# Altium PCB USBAERmini2PCB.PCBDOC (part 1 of 2)
Units mm, origin at the board's own origin, x right, y up, seen from the top; angles counter-clockwise.
Board outline 159.12 x 127.1 mm, 2 copper layers (Top Layer, Bottom Layer); 87 components, 131 nets, 595 pads, 148 vias.
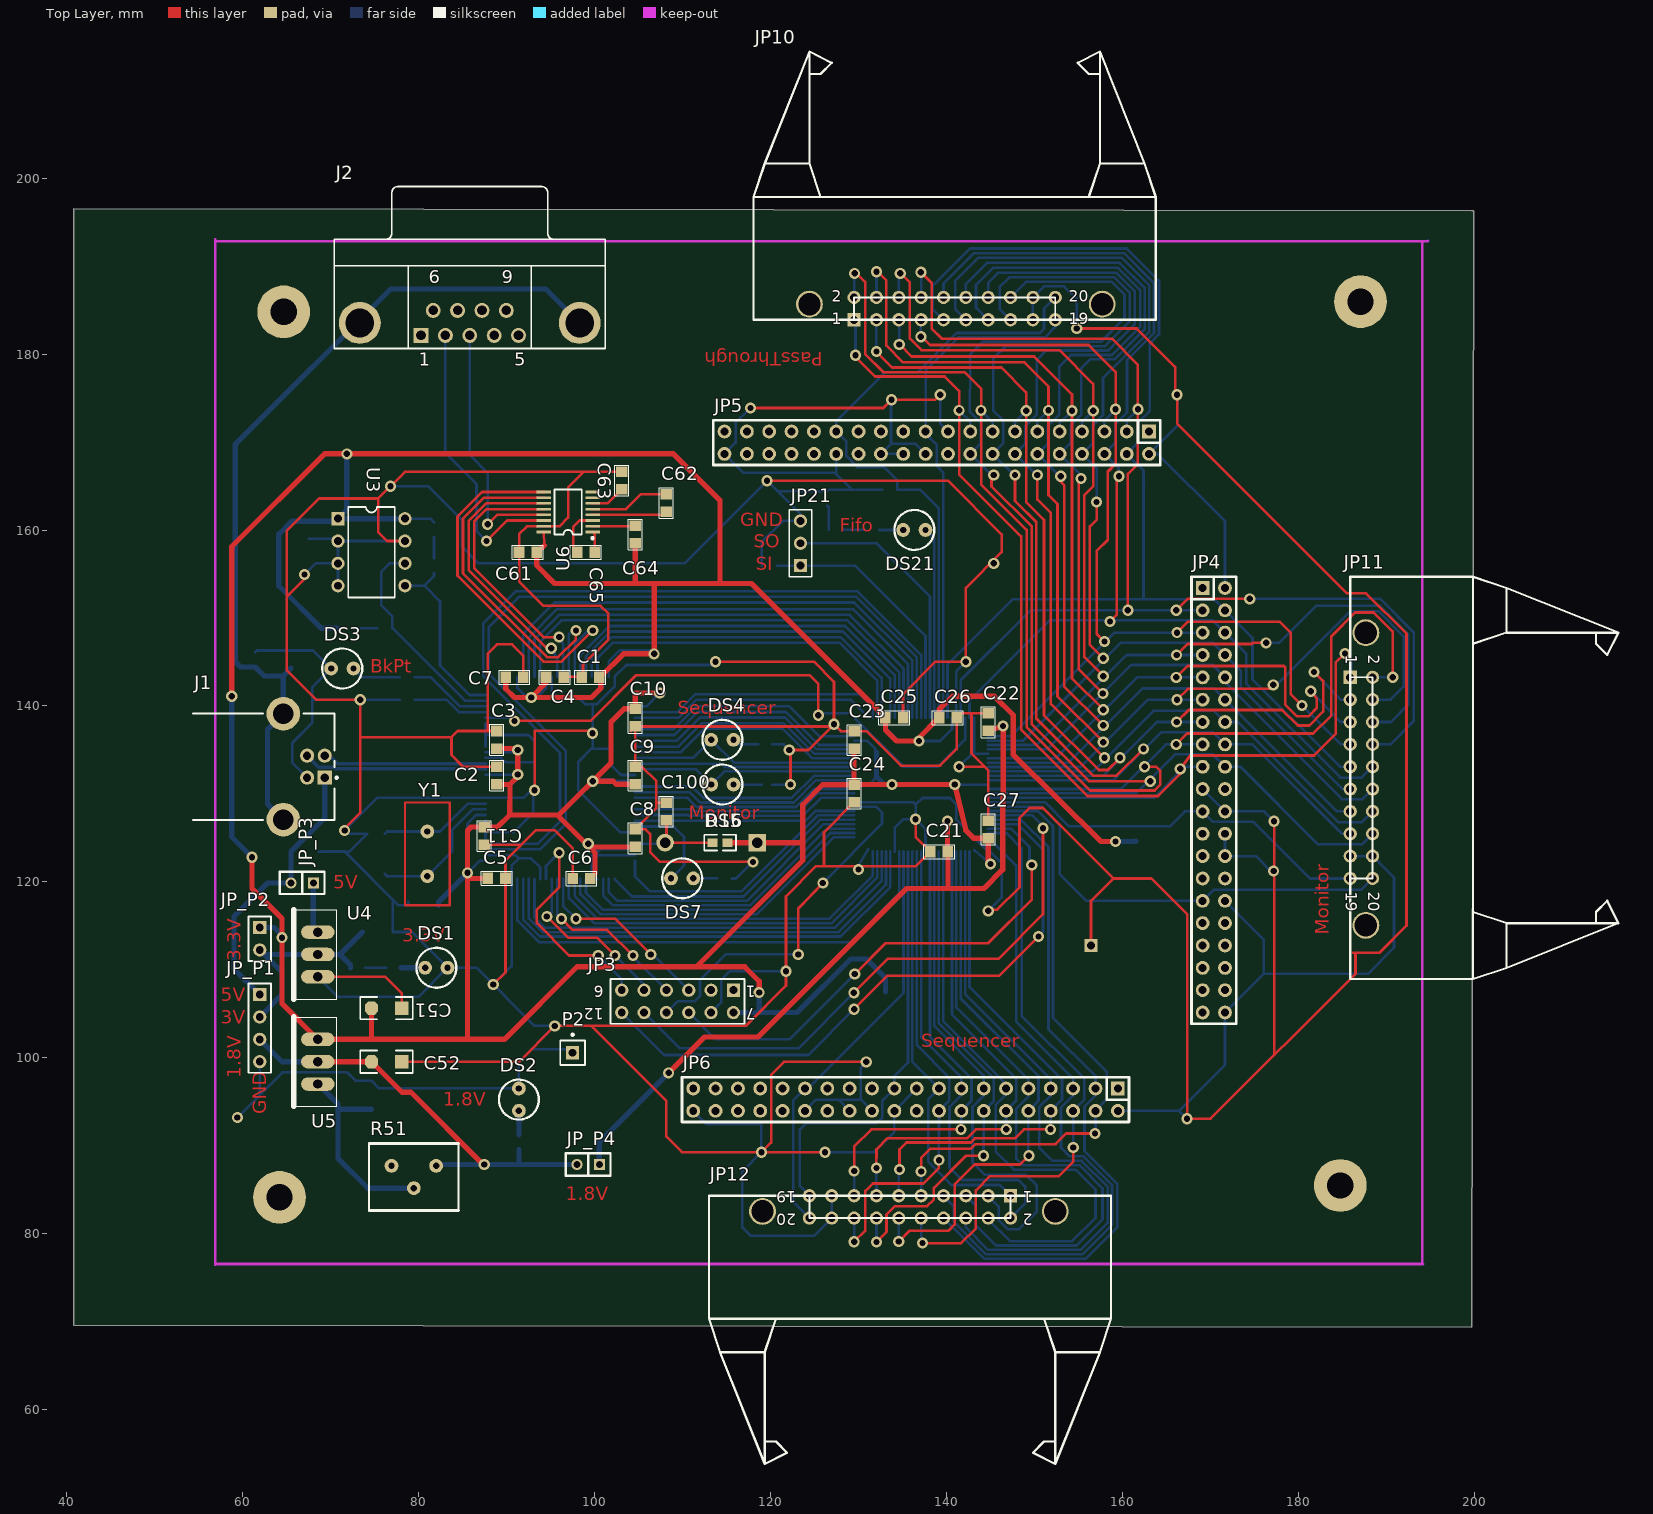
[diagram p0: Top Layer view]
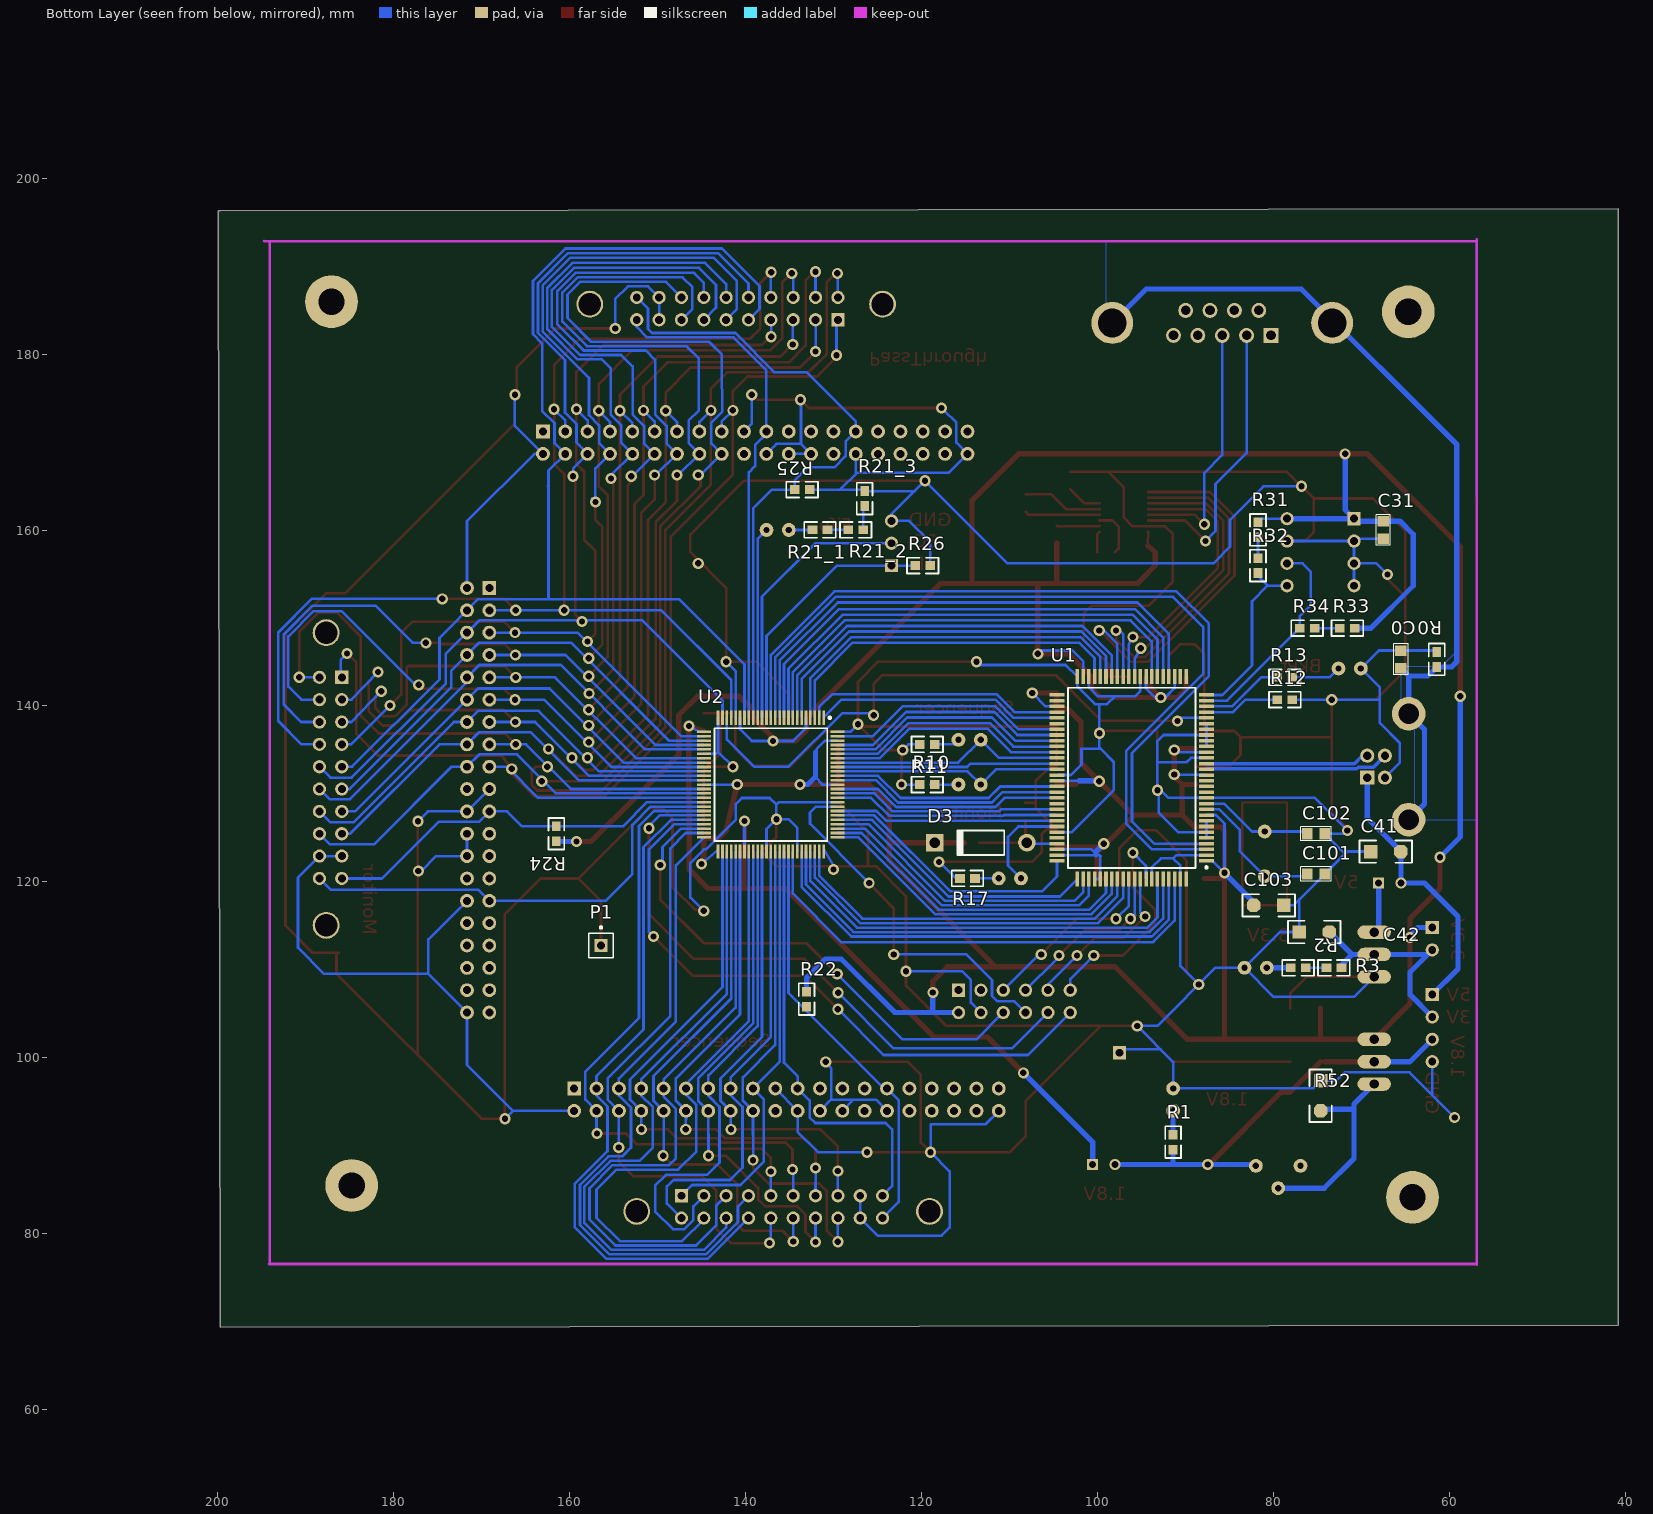
[diagram p1: Bottom Layer view, seen from below]

## Layer stack, top to bottom
Top Layer: signal copper 0.0356
Dielectric: dielectric 0.32, FR-4, Dk 4.8
Bottom Layer: signal copper 0.0356

## Board outline
199.95,196.3 40.825,196.5 40.825,69.6 199.75,69.4 199.95,196.3 199.75,196.3

## Design rules (kind name [scope] priority, off if disabled: settings)
Clearance Clearance_Polygon_USB [(InNet('DMINUS') OR InNet('DPLUS')) vs (InPolygon)] p1: gap=0.2
Clearance Clearance_Polygon [(InPolygon)] p2: gap=0.35
Clearance [All] p3: gap=0.2
ComponentClearance [All] p1: gap=0.254 collisioncheckmode=1 verticalgap=0.254
HoleSize [All] p1: absolutevalues=TRUE maxlimit=3.3 minlimit=0.025 maxpercent=80.000 minpercent=20.000
PolygonConnect [All] p1: connectstyle=Relief reliefconductorwidth=0.254 reliefentries=4 polygonreliefangle="90 Angle"
RoutingPriority "REQ ACK" [(InNet('AERMONREQ') OR InNet('AERMONACK') OR InNet('AERSEQACK') OR InNet('AERSEQREQ') OR InNet('AERPASSACK') OR InNet('AERPASSREQ'))] p1: routingpriority=5
RoutingPriority Buses [(InNetClass('AERMONADD[0..15]') OR InNetClass('FD[0..15]') OR InNetClass('AERSEQADD[0..15]') OR InNetClass('AERSEQADD[0..15]'))] p2: routingpriority=10
RoutingVias [All] p1: holewidth=0.6 width=1 viastyle="Through Hole" minholewidth=0.711 minwidth=1.27 maxholewidth=0.711 maxwidth=1.27
SMDNeckDown [All] p1: percent=100.000
SolderMaskExpansion [All] p1: expansion=0.102
TestPointUsage [All] p1: valid=0 allowmultiple=FALSE
Testpoint [All] p1: side=15 testpointundercomponent=TRUE minsize=1.016 maxsize=2.54 preferedsize=1.524 minholesize=0 maxholesize=1.016 preferedholesize=0.813 testpointgrid=0.025 style=1023 order=0123456789
Width PowerDiodes [(InNet('NetDS1_1') OR InNet('NetDS2_1'))] p1: maxlimit=1 minlimit=0.3 preferedwidth=0.6
Width USB [(InNet('DMINUS') OR InNet('DPLUS'))] p2: maxlimit=0.42 minlimit=0.4 preferedwidth=0.4
Width Power [(InNet('1.8V') OR InNet('1.8V_2') OR InNet('3.3V') OR InNet('5V') OR InNet('5V_2') OR InNet('ADJ1.8') OR InNet('3.3V_2') OR InNet('AGND'))] p3: maxlimit=1 minlimit=0.3 preferedwidth=0.6
Width [All] p4: maxlimit=0.5 minlimit=0.254 preferedwidth=0.3
15 further rules are at their usual default settings.

## Classes and differential pairs
net class PE[0..3]: PE0 PE1 PE2 PE3
net class FD[0..15]: FD0 FD1 FD2 FD3 FD4 FD5 FD6 FD7 FD8 FD9 FD10 FD11 FD12 FD13 FD14 FD15
net class AERSEQADD[0..15]: AERSEQADD0 AERSEQADD1 AERSEQADD2 AERSEQADD3 AERSEQADD4 AERSEQADD5 AERSEQADD6 AERSEQADD7 AERSEQADD8 AERSEQADD9 AERSEQADD10 AERSEQADD11 AERSEQADD12 AERSEQADD13 AERSEQADD14 AERSEQADD15
net class AERMONADD[0..15]: AERMONADD0 AERMONADD1 AERMONADD2 AERMONADD3 AERMONADD4 AERMONADD5 AERMONADD6 AERMONADD7 AERMONADD8 AERMONADD9 AERMONADD10 AERMONADD11 AERMONADD12 AERMONADD13 AERMONADD14 AERMONADD15
component class U_FX2LP: C0 C1 C2 C3 C4 C5 C6 C7 C8 C9 C10 C11 C12 C13 C14 C15 C31 C41 C42 C51 C52 C61 C62 C63 C64 C65 C100 C101 C102 C103 D3 DS1 DS2 DS3 DS7 J1 J2 JP_P1 JP_P2 JP_P3 JP_P4 R0 R1 R2 R3 R11 R12 R13 R17 R31 R32 R33 R34 R51 R52 U1 U3 U4 U5 U6 Y1
component class U_Coolrunner_JTAG_Power: C21 C22 C23 C24 C25 C26 C27 JP3 P1 P2
component class U_Coolrunner_IO: DS4 DS5 DS21 JP4 JP5 JP6 JP10 JP11 JP12 JP21 R10 R11 R21_1 R21_2 R21_3 R22 R24 R25 R26 U2

## Components (designator, comment, footprint, x,y, rotation, side; value= is the part's Value field where it differs from the comment)
C0 "4700pF" "CAP 10" 65.532,145.288 r270 bottom
C1 "Cap" "CAP 10" 99.568,143.256 r0 top
C2 "Cap" "CAP 10" 88.9,132.08 r270 top
C3 "Cap" "CAP 10" 88.9,136.144 r270 top
C4 "Cap" "CAP 10" 95.504,143.256 r180 top
C5 "Cap" "CAP 10" 88.9,120.396 r180 top
C6 "Cap" "CAP 10" 98.552,120.396 r0 top
C7 "Cap" "CAP 10" 90.932,143.256 r180 top
C8 "Cap" "CAP 10" 104.648,124.968 r270 top
C9 "Cap" "CAP 10" 104.648,132.08 r270 top
C10 "Cap" "CAP 10" 104.648,138.684 r90 top
C11 "Cap" "CAP 10" 87.503,125.242 r90 top
C21 "Cap Pol3" "CAP 10" 139.192,123.444 r180 top
C22 "Cap Pol3" "CAP 10" 144.78,138.176 r90 top
C23 "Cap Pol3" "CAP 10" 129.54,136.144 r90 top
C24 "Cap Pol3" "CAP 10" 129.54,130.048 r270 top
C25 "Cap Pol3" "CAP 10" 134.112,138.684 r0 top
C26 "Cap Pol3" "CAP 10" 140.208,138.684 r0 top
C27 "Cap Pol3" "CAP 10" 144.78,125.984 r90 top
C31 "Cap" "CAP 10" 67.564,160.02 r90 bottom
C41 "Cap" 1206(2) 65.532,123.444 r0 bottom
C42 "Cap" 1206(2) 73.66,114.3 r0 bottom
C51 "10uF" 1206(2) 74.676,105.664 r0 top
C52 "10uF" 1206(2) 74.676,99.568 r0 top
C61 "Cap" "CAP 10" 92.456,157.48 r0 top
C62 "Cap" "CAP 10" 108.204,163.068 r270 top
C63 "Cap" "CAP 10" 103.124,165.608 r270 top
C64 "Cap" "CAP 10" 104.648,159.512 r90 top
C65 "Cap" "CAP 10" 99.06,157.48 r0 top
C100 "1uF" "CAP 10" 108.204,128.016 r90 top
C101 "12pF" "CAP 10" 75.184,120.904 r180 bottom
C102 "12pF" "CAP 10" 75.184,125.476 r180 bottom
C103 "Cap" 1206(2) 82.296,117.348 r180 bottom
D3 "Diode 1N4001" DIO10.46-5.3x2.8 113.284,124.46 r0 bottom
DS1 "LED2" LED 80.772,110.236 r0 top
DS2 "LED2" LED 91.44,93.98 r90 top
DS3 "LED2" LED 72.644,144.272 r180 top
DS4 "Monitor" LED 113.284,131.064 r0 top
DS5 "Sequencer" LED 113.284,136.144 r0 top
DS7 "FirmwareRunning" LED 108.712,120.396 r0 top
DS21 "FifoTransaction" LED 137.668,160.02 r180 top
J1 "1-1470156-2" 1-1470156 54.356,133.096 r180 top
J2 "D Connector 9 Female" DSUB1.385-2H9 85.852,193.04 r0 top
JP3 "Header 6X2A" HDR2X6_CEN 115.824,107.696 r180 top
JP4 "AER MonitorIN" IDC-40 169.164,153.416 r270 top
JP5 "AER PassThroughOut" IDC-40 163.068,171.196 r180 top
JP6 "AER SequencerOut" IDC-40 159.512,96.52 r180 top
JP10 "AER PassThrough" "HDR10x2 w/clips" 129.54,183.896 r0 top
JP11 "AER Monitor IN" "HDR10x2 w/clips" 185.928,143.256 r270 top
JP12 "AER SequencerOUT" "HDR10x2 w/clips" 147.32,84.328 r180 top
JP21 "Header 3" HDR1X3 123.444,155.956 r90 top
JP_P1 "Header 4" HDR1X4 61.976,107.188 r270 top
JP_P2 "Header 2" HDR1X2 61.976,114.808 r270 top
JP_P3 "Header 2" SIP-2 68.072,119.888 r180 top
JP_P4 "Header 2" SIP-2 100.584,87.884 r180 top
P1 "Plug" PIN1 156.464,112.776 r180 bottom
P2 "Plug" PIN1 97.536,100.584 r0 top
R0 "Res3" C1608-0603 61.468,145.288 r90 bottom
R1 "Res3" C1608-0603 91.44,90.424 r270 bottom
R2 "Res3" C1608-0603 77.216,110.236 r180 bottom
R3 "Res3" C1608-0603 73.152,110.236 r180 bottom
R10 "Res3" C1608-0603 119.38,131.064 r180 bottom
R11 "Res3" C1608-0603 119.38,135.636 r180 bottom
R12 "Res3" C1608-0603 78.74,140.716 r180 bottom
R13 "Res3" C1608-0603 78.74,143.256 r0 bottom
R16 "100K" C1608-0603 114.3,124.46 r0 top
R17 "Res3" C1608-0603 114.808,120.396 r180 bottom
R21_1 "Res3" C1608-0603 131.572,160.02 r0 bottom
R21_2 "Res3" C1608-0603 127.508,160.02 r0 bottom
R21_3 "Res3" C1608-0603 126.492,163.576 r270 bottom
R22 "Res3" C1608-0603 133.096,106.68 r90 bottom
R24 "Res3" C1608-0603 161.544,125.476 r90 bottom
R25 "Res3" C1608-0603 133.604,164.592 r0 bottom
R26 "Res3" C1608-0603 119.888,155.956 r180 bottom
R31 "Res3" C1608-0603 81.788,160.02 r90 bottom
R32 "Res3" C1608-0603 81.788,155.956 r90 bottom
R33 "Res3" C1608-0603 71.628,148.844 r0 bottom
R34 "Res3" C1608-0603 76.2,148.844 r180 bottom
R51 "180" Pot 108.712,91.948 r180 top
R52 "Res3" 1206(2) 74.676,93.98 r90 bottom
U1 "FX2LP" R-QFP14x20-G100/X.4N 96.139,131.826 r90 bottom
U2 "XC2C256-6VQ100C" VQ100 137.16,131.064 r270 bottom
U3 "M24C16RBN6" PSDIP8A 74.676,157.48 r270 top
U4 "VoltReg" TO-220 68.58,109.22 r90 top
U5 "VoltRegAdj" TO-220 68.58,97.028 r90 top
U6 "RS232Transceiver" TSSO5x6-G16 97.028,162.052 r90 top
Y1 "24 MHz" Cristal 76.708,123.444 r0 top

## Footprints (in the part's own frame and the unit in brackets; to place one, negate y for a bottom-side part, rotate by r counter-clockwise, add the part's x,y. Pads: shape width x height; smd on the part's side, far side on the other; paste and mask are expansions set on the pad)
1-1470156 [mm] "Connector; USB1.1, Type B, Thru-Hole; 4 Position; Right Angle"
  rect 1.6x1.6 hole 0.92: 1(-15.01,1.25)
  round 1.6 hole 0.92: 2(-15.01,-1.25) 3(-13.01,-1.25) 4(-13.01,1.25)
  round 3.8 hole 2.3: 5(-10.3,6.02) 6(-10.3,-6.02)
  silkscreen extent -16.49,-6.05 -0.02,6.05
1206(2) [mil]
  oct 60x60 smd: 1(0.35,-0.34)
  rect 60x60 smd: 2(135.35,-0.34)
  silkscreen extent -50,-50 185,50
C1608-0603 [mm]
  rect 1.1x1 smd: 1(-0.85,0) 2(0.85,0)
  silkscreen extent -1.8,-0.9 1.8,0.9
"CAP 10" [mm]
  rect 1.2x1.3 smd: 1(-1.01,-0.004) 2(0.99,-0.004)
  silkscreen extent -1.76,-0.8 1.74,0.8
Cristal [mil] "Cristal de cuarzo"
  round 62 hole 28: 1(170,90) 2(170,-110)
  Top Layer lines w10: 70,-240 270,-240 270,220 70,220 70,-240
DIO10.46-5.3x2.8 [mm]
  round 2 hole 1.2: 1(-5.23,0)
  rect 2x2 hole 1.2: 2(5.23,0)
  silkscreen extent -2.65,-1.4 2.75,1.4
DSUB1.385-2H9 [mm] "Connector; D Subminiature; 9 Position; Right Angle; Pitch 1.385 mm"
  rect 1.69x1.69 hole 1.09: 1(-5.54,-10.92)
  round 1.69 hole 1.09: 2(-2.77,-10.92) 3(0,-10.92) 4(2.77,-10.92) 5(5.54,-10.92) 6(-4.155,-8.08) 7(-1.385,-8.08) 8(1.385,-8.08) 9(4.155,-8.08)
  round 4.76 hole 3.26: 10(-12.495,-9.5) 11(12.495,-9.5)
  silkscreen extent -15.4,-12.4 15.4,6
HDR1X2 [mm] "Connector; Header; 2 Position"
  rect 1.5x1.5 hole 0.9: 1(0,0)
  round 1.5 hole 0.9: 2(2.54,0)
  silkscreen extent -1.27,-1.27 3.81,1.27
HDR1X3 [mm] "Connector; Header; 3 Position"
  rect 1.5x1.5 hole 0.9: 1(0,0)
  round 1.5 hole 0.9: 2(2.54,0) 3(5.08,0)
  silkscreen extent -1.27,-1.27 6.35,1.27
HDR1X4 [mm] "Connector; Header; 4 Position"
  rect 1.5x1.5 hole 0.9: 1(0,0)
  round 1.5 hole 0.9: 2(2.54,0) 3(5.08,0) 4(7.62,0)
  silkscreen extent -1.27,-1.27 8.89,1.27
HDR2X6_CEN [mm] "Connector; Header; 6x2 Position"
  rect 1.5x1.5 hole 0.9: 1(0,0)
  round 1.5 hole 0.9: 2(2.54,0) 3(5.08,0) 4(7.62,0) 5(10.16,0) 6(12.7,0) 7(0,2.54) 8(2.54,2.54) 9(5.08,2.54) 10(7.62,2.54) 11(10.16,2.54) 12(12.7,2.54)
  silkscreen extent -1.27,-1.27 13.97,3.81
"HDR10x2 w/clips" [mm]
  rect 1.5x1.5 hole 0.9: 1(0,0)
  round 1.5 hole 0.9: 2(0,2.54) 3(2.54,0) 4(2.54,2.54) 5(5.08,0) 6(5.08,2.54) 7(7.62,0) 8(7.62,2.54) 9(10.16,0) 10(10.16,2.54) 11(12.7,0) 12(12.7,2.54) 13(15.24,0) 14(15.24,2.54) 15(17.78,0) 16(17.78,2.54) 17(20.32,0) 18(20.32,2.54) 19(22.86,0) 20(22.86,2.54)
  round 3.048 hole 2.54: ""(-5.08,1.778) ""(28.194,1.778)
  silkscreen extent -11.43,0 34.29,30.48
IDC-40 [mil]
  rect 62x62 hole 35.43: 1(0.04,-0.11)
  round 62 hole 35.43: 2(0.04,99.89) 3(100.04,-0.11) 4(100.04,99.89) 5(200.04,-0.11) 6(200.04,99.89) 7(300.04,-0.11) 8(300.04,99.89) 9(400.04,-0.11) 10(400.04,99.89) 11(500.04,-0.11) 12(500.04,99.89) 13(600.04,-0.11) 14(600.04,99.89) 15(700.04,-0.11) 16(700.04,99.89) 17(800.04,-0.11) 18(800.04,99.89) 19(900.04,-0.11) 20(900.04,99.89) 21(1000.04,-0.11) 22(1000.04,99.89) 23(1100.04,-0.11) 24(1100.04,99.89) 25(1200.04,-0.11) 26(1200.04,99.89) 27(1300.04,-0.11) 28(1300.04,99.89) 29(1400.04,-0.11) 30(1400.04,99.89) 31(1500.04,-0.11) 32(1500.04,99.89) 33(1600.04,-0.11) 34(1600.04,99.89) 35(1700.04,-0.11) 36(1700.04,99.89) 37(1800.04,-0.11) 38(1800.04,99.89) 39(1900.04,-0.11) 40(1900.04,99.89)
  silkscreen extent -50,-50 1950,150
LED [mil]
  round 62 hole 28: A(0.43,0.44) K(100.43,0.44)
  silkscreen extent -39,-89 140,90
PIN1 [mm] "Connector; Coax-F"
  rect 1.5x1.5 hole 0.9: 1(0,0)
  silkscreen extent -1.4,-1.4 1.4,2.17
Pot [mil] "Potentiometer"
  round 62 hole 28: 1(1050.39,166.06) 2(1250.39,166.06) 3(1150.39,266.06)
  silkscreen extent 950,66 1350,366
PSDIP8A [mm] "DIP; 8 Leads; Row Spacing 7.62 mm; Pitch 2.54 mm"
  rect 1.5x1.5 hole 0.9: 1(-3.81,-3.81)
  round 1.5 hole 0.9: 2(-1.27,-3.81) 3(1.27,-3.81) 4(3.81,-3.81) 5(3.81,3.81) 6(1.27,3.81) 7(-1.27,3.81) 8(-3.81,3.81)
  silkscreen extent -5.15,-2.65 5.15,2.65
R-QFP14x20-G100/X.4N [mm] "QFP; 100 Leads; Body 14 x 20 mm; Pitch 0.65 mm"
  rect 0.4x1.7 smd: 1(-9.425,-8.5) 2(-8.775,-8.5) 3(-8.125,-8.5) 4(-7.475,-8.5) 5(-6.825,-8.5) 6(-6.175,-8.5) 7(-5.525,-8.5) 8(-4.875,-8.5) 9(-4.225,-8.5) 10(-3.575,-8.5) 11(-2.925,-8.5) 12(-2.275,-8.5) 13(-1.625,-8.5) 14(-0.975,-8.5) 15(-0.325,-8.5) 16(0.325,-8.5) 17(0.975,-8.5) 18(1.625,-8.5) 19(2.275,-8.5) 20(2.925,-8.5) 21(3.575,-8.5) 22(4.225,-8.5) 23(4.875,-8.5) 24(5.525,-8.5) 25(6.175,-8.5) 26(6.825,-8.5) 27(7.475,-8.5) 28(8.125,-8.5) 29(8.775,-8.5) 30(9.425,-8.5) 51(9.425,8.5) 52(8.775,8.5) 53(8.125,8.5) 54(7.475,8.5) 55(6.825,8.5) 56(6.175,8.5) 57(5.525,8.5) 58(4.875,8.5) 59(4.225,8.5) 60(3.575,8.5) 61(2.925,8.5) 62(2.275,8.5) 63(1.625,8.5) 64(0.975,8.5) 65(0.325,8.5) 66(-0.325,8.5) 67(-0.975,8.5) 68(-1.625,8.5) 69(-2.275,8.5) 70(-2.925,8.5) 71(-3.575,8.5) 72(-4.225,8.5) 73(-4.875,8.5) 74(-5.525,8.5) 75(-6.175,8.5) 76(-6.825,8.5) 77(-7.475,8.5) 78(-8.125,8.5) 79(-8.775,8.5) 80(-9.425,8.5)
  rect 1.7x0.4 smd: 31(11.5,-6.175) 32(11.5,-5.525) 33(11.5,-4.875) 34(11.5,-4.225) 35(11.5,-3.575) 36(11.5,-2.925) 37(11.5,-2.275) 38(11.5,-1.625) 39(11.5,-0.975) 40(11.5,-0.325) 41(11.5,0.325) 42(11.5,0.975) 43(11.5,1.625) 44(11.5,2.275) 45(11.5,2.925) 46(11.5,3.575) 47(11.5,4.225) 48(11.5,4.875) 49(11.5,5.525) 50(11.5,6.175) 81(-11.5,6.175) 82(-11.5,5.525) 83(-11.5,4.875) 84(-11.5,4.225) 85(-11.5,3.575) 86(-11.5,2.925) 87(-11.5,2.275) 88(-11.5,1.625) 89(-11.5,0.975) 90(-11.5,0.325) 91(-11.5,-0.325) 92(-11.5,-0.975) 93(-11.5,-1.625) 94(-11.5,-2.275) 95(-11.5,-2.925) 96(-11.5,-3.575) 97(-11.5,-4.225) 98(-11.5,-4.875) 99(-11.5,-5.525) 100(-11.5,-6.175)
  silkscreen extent -10.3,-8.62 10.25,7.25
SIP-2 [mil]
  rect 50x50 hole 32: 1(-0.02,0.17)
  round 50 hole 32: 2(99.98,0.17)
  silkscreen extent -50,-50 150,50
TO-220 [mil]
  oval 60x150 hole 42: 1(-0.11,0.11) 2(99.89,0.11) 3(199.89,0.11)
  silkscreen extent -100,-85 300,108
TSSO5x6-G16 [mm]
  rect 0.3x1.65 smd: 1(-2.275,-2.775) 2(-1.625,-2.775) 3(-0.975,-2.775) 4(-0.325,-2.775) 5(0.325,-2.775) 6(0.975,-2.775) 7(1.625,-2.775) 8(2.275,-2.775) 9(2.275,2.775) 10(1.625,2.775) 11(0.975,2.775) 12(0.325,2.775) 13(-0.325,2.775) 14(-0.975,2.775) 15(-1.625,2.775) 16(-2.275,2.775)
  silkscreen extent -3.1,-2.9 2.55,1.55
VQ100 [mm] "100-Pin Very Thin Quad Flat Pack (VQ100)"
  rect 1.6x0.3 smd: 1(-7.6,6) 2(-7.6,5.5) 3(-7.6,5) 4(-7.6,4.5) 5(-7.6,4) 6(-7.6,3.5) 7(-7.6,3) 8(-7.6,2.5) 9(-7.6,2) 10(-7.6,1.5) 11(-7.6,1) 12(-7.6,0.5) 13(-7.6,0) 14(-7.6,-0.5) 15(-7.6,-1) 16(-7.6,-1.5) 17(-7.6,-2) 18(-7.6,-2.5) 19(-7.6,-3) 20(-7.6,-3.5) 21(-7.6,-4) 22(-7.6,-4.5) 23(-7.6,-5) 24(-7.6,-5.5) 25(-7.6,-6) 51(7.6,-6) 52(7.6,-5.5) 53(7.6,-5) 54(7.6,-4.5) 55(7.6,-4) 56(7.6,-3.5) 57(7.6,-3) 58(7.6,-2.5) 59(7.6,-2) 60(7.6,-1.5) 61(7.6,-1) 62(7.6,-0.5) 63(7.6,0) 64(7.6,0.5) 65(7.6,1) 66(7.6,1.5) 67(7.6,2) 68(7.6,2.5) 69(7.6,3) 70(7.6,3.5) 71(7.6,4) 72(7.6,4.5) 73(7.6,5) 74(7.6,5.5) 75(7.6,6)
  rect 0.3x1.6 smd: 26(-6,-7.6) 27(-5.5,-7.6) 28(-5,-7.6) 29(-4.5,-7.6) 30(-4,-7.6) 31(-3.5,-7.6) 32(-3,-7.6) 33(-2.5,-7.6) 34(-2,-7.6) 35(-1.5,-7.6) 36(-1,-7.6) 37(-0.5,-7.6) 38(0,-7.6) 39(0.5,-7.6) 40(1,-7.6) 41(1.5,-7.6) 42(2,-7.6) 43(2.5,-7.6) 44(3,-7.6) 45(3.5,-7.6) 46(4,-7.6) 47(4.5,-7.6) 48(5,-7.6) 49(5.5,-7.6) 50(6,-7.6) 76(6,7.6) 77(5.5,7.6) 78(5,7.6) 79(4.5,7.6) 80(4,7.6) 81(3.5,7.6) 82(3,7.6) 83(2.5,7.6) 84(2,7.6) 85(1.5,7.6) 86(1,7.6) 87(0.5,7.6) 88(0,7.6) 89(-0.5,7.6) 90(-1,7.6) 91(-1.5,7.6) 92(-2,7.6) 93(-2.5,7.6) 94(-3,7.6) 95(-3.5,7.6) 96(-4,7.6) 97(-4.5,7.6) 98(-5,7.6) 99(-5.5,7.6) 100(-6,7.6)
  silkscreen extent -7.72,-6.4 6.4,6.82

## Part data
C0 C51 C52 C101 C102: library part Cap, "Capacitor"
C1 C2 C3 C4 C5 C6 C7 C8 C9 C10 C11 C31 C41 C42 C103: "Capacitor"
C21 C22 C23 C24 C25 C26 C27: "Polarized Capacitor (Surface Mount)"
C61 C62 C63 C64 C65 C100: library part "Cap Pol3", "Polarized Capacitor (Surface Mount)"
D3: library part Diode, "Default Diode"
DS1 DS2 DS3: "Typical RED, GREEN, YELLOW, AMBER GaAs LED"
DS4 DS5 DS7 DS21: library part LED2, "Typical RED, GREEN, YELLOW, AMBER GaAs LED"
J1: "USB 1.1, Right Angle, Thru-Hole, B Type, Receptacle, 4 Position, Black"
J2: library part "D Connector 9", "Receptacle Assembly, 9 Position, Right Angle"
JP3: "Header, 6-Pin, Dual row"
JP4 JP5 JP6: library part MHDR2X20, "Header, 20-Pin, Dual row"
JP10 JP11 JP12: library part "Header 10X2", "Header, 10-Pin, Dual row"
JP21: "Header, 3-Pin"
JP_P1: "Header, 4-Pin"
JP_P2 JP_P3 JP_P4: "Header, 2-Pin"
R0 R2 R3 R10 R11 R12 R13 R17 R21_1 R21_2 R21_3 R22 R24 R25 R26 R31 R32 R33 R34: "Resistor"
R1 R51: library part RPot, "Potentiometer"
R16: library part Res3, "Resistor"
R52: library part Res1, "Resistor"
U1: "Cypress FX2LP 100 pin"
U2: "CoolRunner-II, 1.8V, 256 Macrocell CPLD, 100-Pin VQFP, Commercial Grade"
U3: "16Kbit Serial I²C Bus EEPROM"
U4: "5 to 3.3 volts regulator"
U5: library part VoltReg, "5 to 3.3 volts regulator"
U6: "Analog Devices RS232 Transceiver"
Y1: library part XTAL, "Crystal Oscillator"

## Free pads (board coordinates)
  round 6 hole 3: 0(64.7,184.8) 1(187.1,185.95) 2(184.8,85.5) 3(64.225,84.15)

## Via types
v1: diameter 1.27, hole 0.711, Top Layer to Bottom Layer, 148 vias

## Nets (pads, with @x,y where several pads share a name; then routed paths per layer and width w, separated by ;. In a path a pad name is that pad's centre, name@x,y a point inside that pad or via, vN(x,y) a via of type N, cw(c..) or ccw(c..) an arc to the next point about the centre after c; other vN are vias at no path point)
1.8V: C21.1 C22.1 JP_P4.1 U2.26 U2.57 | length 92.4
  Top Layer w0.6: v1(108.458,98.298) 112.522,102.362 118.618,102.362 135.509,119.253 144.3,119.25 146.425,121.4 v1(146.475,137.725) 145.421,137.391 C22.1@144.784,137.166 ; v1(140.16,126.921) 140.16,123.494 140.214,123.44 140.214,119.259
  Bottom Layer w0.3: U2.57@140.16,123.464 v1(140.16,126.921) ; U2.26@144.76,137.064 145.319,137.064 v1(146.475,137.725)
  Bottom Layer w0.6: JP_P4.1@100.584,87.88 100.584,90.424 v1(108.458,98.298)
1.8V_2: C52.1 JP_P1.3 JP_P4.2 R1.2 R51.1 U5.2 | length 48.4
  Top Layer w0.6: U5.2@68.577,99.565 C52.1@74.171,99.565 ; C52.1@74.685,99.559 78.144,96.1 79.16,96.1 v1@87.249,88.011
  Bottom Layer w0.6: JP_P1.3@61.976,102.108 64.519,99.565 U5.2@68.577,99.565 ; R51.1@82.032,87.73 82.186,87.884 91.274,87.884 91.44,88.05 R1.2@91.44,89.574 ; 91.278,87.88 JP_P4.2@98.044,87.88
  other v1: 87.503,87.884
3.3V: C1.2 C2.2 C3.2 C4.2 C5.2 C6.2 C7.2 C8.2 C9.2 C10.2 C11.2 C23.1 C24.1 C25.1 C26.1 C27.1 C31.2 C51.1 C61.2 C64.1 C103.1 D3.2 JP3.7 JP_P2.1 R16.2 R22.2 R24.1 R31.2 R33.1 U1.1 U1.9 U1.16 U1.20 U1.33 U1.38 U1.49 U1.53 U1.66 U1.78 U1.79 U1.84 U1.85 U2.5 U2.20 U2.38 U2.51 U2.88 U2.98 U3.1 U3.8 U5.3 U6.16 | length 634.3
  Top Layer w0.3: U6.16@94.253,159.777 94.325,158.25
  Top Layer w0.6: v1(58.801,141.097) 58.801,158.115 69.342,168.656 109.019,168.656 114.3,163.375 114.3,153.924 ; v1(61.087,122.809) 61.087,119.253 64.516,115.824 64.516,106.166 U5.3@68.577,102.105 89.786,102.105 98.044,110.363 117.094,110.363 118.745,108.712 v1(118.745,107.442) ; U3.1@70.586,161.01 U3.1@70.866,161.29 ; 74.685,102.145 C51.1@74.685,105.655 ; 85.598,102.157 85.598,125.857 85.973,126.232 89.021,126.232 90.39,127.601 ; 85.598,118.375 85.605,118.368 ; v1@85.602,120.4 C5.2@87.91,120.4 ; C2.2@88.896,131.09 90.39,131.064 91.313,131.987 v1(91.313,135.001) 91.16,135.154 C3.2@88.896,135.154 ; C7.2@89.942,142.752 C7.2@89.942,143.26 89.942,141.96 90.932,140.97 99.695,140.97 100.724,141.999 100.724,143.322 103.325,145.923 v1(106.807,145.923) 106.807,153.924 ; 90.424,130.937 90.39,127.601 ; v1(92.837,140.97) 94.514,142.647 C4.2@94.514,143.26 ; 94.325,158.25 93.466,157.456 93.466,155.96 95.502,153.924 117.858,153.924 C25.1@133.102,138.68 133.102,137.281 134.366,136.017 v1(136.906,136.017) 136.906,136.388 C26.1@139.198,138.68 139.198,139.579 140.716,141.097 145.503,141.097 147.625,138.975 147.625,134.425 147.7,134.35 157.607,124.587 v1(159.258,124.587) ; 95.792,127.601 100.076,123.317 100.076,120.926 C6.2@99.542,120.392 ; v1(99.314,124.333) 99.669,123.978 C8.2@104.644,123.978 ; v1(99.822,131.445) 102.164,131.445 102.519,131.09 C9.2@104.644,131.09 ; 104.65,153.924 104.652,153.926 C64.1@104.652,158.502 ; v1(107.442,141.478) 104.652,141.478 C10.2@104.652,139.674 103.374,139.674 101.9,138.2 101.9,133.523 96.012,127.635 90.39,127.601 ; 111.633,110.363 123.698,122.428 123.698,128.778 125.978,131.058 C24.1@129.536,131.058 ; R16.2@115.15,124.46 123.613,124.46 123.698,124.375 ; C23.1@129.544,135.134 129.536,135.127 C24.1@129.536,131.058 ; v1(145.034,122.047) 144.784,122.297 C27.1@144.784,124.974 143.123,124.974 142.24,125.857 v1(140.97,131.064) 129.542,131.064 C24.1@129.536,131.058
  Bottom Layer w0.3: U3.8@78.486,161.29 81.368,161.29 R31.2@81.788,160.87 ; v1(85.598,121.031) 85.598,126.619 86.58,127.601 U1.9@87.639,127.601 ; v1@85.852,121.285 86.968,122.401 U1.1@87.639,122.401 ; U1.16@87.639,132.151 v1(91.313,132.207) ; U1.20@87.639,134.751 v1@91.059,134.747 ; U1.33@91.264,143.326 91.264,142.035 92.329,140.97 93.472,140.97 94.514,142.012 U1.38@94.514,143.326 ; 100.076,123.051 100.726,123.701 U1.78@104.639,123.701 ; U1.84@100.364,120.326 U1.85@99.714,120.326 99.714,122.917 99.695,122.936 99.81,123.051 U1.79@104.639,123.051 ; U1.49@101.664,143.326 101.664,145.098 102.87,146.304 v1@106.807,146.304 ; 102.108,131.501 U1.66@104.639,131.501 ; U1.53@104.639,139.951 105.915,139.951 v1(107.442,141.478) ; U2.88@129.56,131.064 131.318,131.064 132.08,131.953 ; U2.98@129.56,136.064 131.017,136.064 131.953,135.128 131.953,134.239 ; U2.5@133.16,138.664 133.16,137.477 134.62,136.017 139.319,136.017 140.66,137.358 U2.20@140.66,138.664 ; v1(140.97,131.064) U2.38@144.76,131.064 ; U2.51@143.225,123.602 143.256,123.575 145.026,122.038 145.034,122.03 v1@145.161,121.92
  Bottom Layer w0.6: v1(58.801,141.097) 58.801,125.095 v1(61.087,122.809) ; JP_P2.1@61.976,114.808 63.627,114.808 v1@64.643,113.792 ; R33.1@70.8,148.85 68.961,148.844 64.135,153.67 64.135,159.512 65.633,161.01 70.586,161.01 71.882,162.306 v1(71.882,168.656) ; U3.1@70.866,161.29 U3.8@78.486,161.29 ; C103.1@82.287,117.339 82.287,117.72 v1(85.598,121.031) ; v1(99.314,124.333) 100.203,123.444 100.203,123.051 ; v1(99.822,131.445) 99.878,131.501 102.108,131.501 ; JP3.7@115.824,105.156 123.063,105.156 129.159,111.252 130.937,111.252 133.096,109.093 R22.2@133.096,107.53 ; 118.745,105.156 v1(118.745,107.442) ; 132.08,134.747 132.08,131.953 132.969,131.064 v1(133.858,131.064) ; v1(159.258,124.587) 161.505,124.587 R24.1@161.544,124.626
  other v1: 64.516,113.665
3.3V_2: C42.1 JP_P1.2 JP_P2.2 R3.2 U4.2 | length 24
  Bottom Layer w0.6: JP_P1.2@61.976,104.648 64.516,107.188 64.516,109.728 JP_P2.2@61.976,112.268 ; JP_P2.2@62.487,111.757 71.118,111.757 ; R3.2@72.302,110.236 72.302,110.573 71.118,111.757 ; C42.1@73.669,114.309 71.118,111.757
5V: C41.1 J1.1 JP_P1.1 JP_P3.2 | length 31.7
  Bottom Layer w0.6: JP_P1.1@61.976,107.188 59.055,110.109 59.055,116.078 62.861,119.884 JP_P3.2@65.532,119.884 65.541,119.892 C41.1@65.541,123.453 69.366,127.278 J1.1@69.366,131.846
5V_2: JP_P3.1 U4.3 | length 5.8
  Bottom Layer w0.6: JP_P3.1@68.072,119.884 68.072,114.802 U4.3@68.577,114.297
ADJ1.8: R51.3 R52.1 U5.1 | length 23.2
  Bottom Layer w0.6: U5.1@68.577,97.025 70.866,94.736 70.866,88.584 74.26,85.19 R51.3@79.492,85.19 ; 70.895,94.146 R52.1@74.676,94.146
AERMONACK: JP4.29 JP11.20 U2.43 | length 52.5
  Bottom Layer w0.3: U2.43@144.76,128.564 150.836,128.564 152.908,126.492 152.908,120.904 155.957,117.855 JP4.29@169.161,117.855 170.406,119.1 187.172,119.1 JP11.20@188.468,120.396
AERMONADD0: JP4.17 JP5.17 JP10.1 JP11.1 U2.41 | length 143
  Top Layer w0.3: v1@129.55,179.825 131.925,177.45 139.825,177.45 141.475,175.8 141.475,166.325 148.525,159.275 148.525,137.3 156.05,129.775 164.1,129.775 166.6,132.275 v1(166.6,132.85) 167.75,134.375 181.825,134.375 184.275,136.825 184.275,144.925 v1(185.325,145.975)
  Bottom Layer w0.3: JP10.1@129.54,183.896 129.7,183.736 v1(129.7,179.875) ; v1(141.475,173.6) 142.747,172.328 JP5.17@142.747,171.199 ; U2.41@144.76,129.564 163.598,129.564 167.129,133.095 JP4.17@169.161,133.095 ; v1(185.325,145.975) 186.05,145.25 JP11.1@186.05,143.05
AERMONADD1: JP4.15 JP5.15 JP10.2 JP11.2 U2.39 | length 164
  Top Layer w0.3: v1@129.6,189.4 130.8,188.2 130.8,180 132.85,177.95 142.1,177.95 143.975,176.075 143.975,165.2 149.15,160.025 149.15,137.6 156.35,130.4 163.7,130.4 164.35,131.05 164.35,132.6 163.854,133.096 v1(162.56,133.096) ; v1(166.15,135.635) 167.39,136.875 181.725,136.875 183.775,138.925 183.775,147.925 186.475,150.625 188.6,150.625 190.756,148.469 v1(190.756,143.256)
  Bottom Layer w0.3: JP10.2@129.54,186.436 129.54,189.115 v1(129.6,189.175) ; v1(143.975,173.6) 145.287,172.288 JP5.15@145.287,171.199 ; U2.39@144.76,130.564 159.901,130.564 164.972,135.635 JP4.15@169.161,135.635 ; JP11.2@188.468,143.256 v1(190.756,143.256)
AERMONADD2: JP4.13 JP5.13 JP10.3 JP11.3 U2.36 | length 130.9
  Top Layer w0.3: v1@132.075,180.4 132.075,180.25 133.85,178.475 146.275,178.475 149.098,175.652 149.098,163.195 151.13,161.163 151.13,138.938 157.353,132.715 158.369,132.715 v1(159.766,134.112) ; v1(166.2,138.175) 167.575,139.55 178.2,139.55 179.975,137.775 181.275,137.775 182.85,139.35 182.85,142.85 v1(181.825,143.875)
  Bottom Layer w0.3: v1(132.075,180.3) 132.075,183.891 JP10.3@132.08,183.896 ; U2.36@144.76,132.064 157.845,132.064 163.956,138.175 JP4.13@169.161,138.175 ; JP5.13@147.827,171.199 147.827,172.279 v1(149.098,173.55) ; v1(181.825,143.875) 184.809,140.716 JP11.3@185.928,140.716
AERMONADD3: JP4.11 JP5.11 JP10.4 JP11.4 U2.34 | length 146.3
  Top Layer w0.3: v1@132.075,189.5 133.2,188.375 133.2,180.95 135.1,179.05 148.9,179.05 151.638,176.312 151.638,163.957 152.654,162.941 152.654,141.097 v1(157.861,135.89) ; v1(166.25,140.715) 167.485,141.95 v1@176.95,141.95
  Bottom Layer w0.3: JP10.4@132.08,186.436 v1@132.08,189.345 ; U2.34@144.76,133.064 155.289,133.064 162.94,140.715 JP4.11@169.161,140.715 ; JP5.11@150.367,171.199 150.367,172.329 v1(151.638,173.6) ; v1(177.175,142.4) 177.575,142.4 185.95,150.775 189.125,150.775 192,147.9 192,142.2 190.516,140.716 JP11.4@188.468,140.716
  other v1: 132.075,189.35
AERMONADD4: JP4.9 JP5.9 JP10.5 JP11.5 U2.32 | length 123.1
  Top Layer w0.3: v1@134.675,181.125 136.075,179.725 150,179.725 154.305,175.42 154.305,143.129 v1(157.861,139.573) ; v1(166.15,143.255) 167.445,144.55 178.375,144.55 178.525,144.4 178.525,140.175 179.85,138.85 181.225,138.85 182.125,139.75 182.125,140.875 v1(181.45,141.675)
  Bottom Layer w0.3: JP10.5@134.62,183.896 134.675,183.841 v1@134.675,181.125 ; U2.32@144.76,134.064 152.479,134.064 161.67,143.255 JP4.9@169.161,143.255 ; JP5.9@152.907,171.199 152.907,172.152 v1(154.305,173.55) ; v1(181.45,141.675) 184.824,138.176 JP11.5@185.928,138.176
  other v1: 134.675,181.075
AERMONADD5: JP4.7 JP5.7 JP10.6 JP11.6 U2.29 | length 142.9
  Top Layer w0.3: v1@134.575,189.45 135.875,188.15 135.875,181.775 137.2,180.45 152.875,180.45 156.718,176.607 156.718,164.973 155.702,163.957 155.702,145.542 v1(157.861,143.383) ; v1(166.2,145.795) 167.455,147.05 174.75,147.05 174.875,147.175 v1(176.375,147.175)
  Bottom Layer w0.3: JP10.6@134.62,186.436 134.62,189.02 v1(134.775,189.175) ; U2.29@144.76,135.564 150.296,135.564 160.527,145.795 JP4.7@169.161,145.795 ; JP5.7@155.447,171.199 155.447,172.279 v1(156.718,173.55) ; v1(176.375,147.175) 177.85,147.175 182.075,151.4 189.25,151.4 192.525,148.125 192.525,140.152 190.549,138.176 JP11.6@188.468,138.176
AERMONADD6: JP4.5 JP5.5 JP10.7 JP11.7 U2.27 | length 120.1
  Top Layer w0.3: v1@137.125,182.075 138.175,181.025 156.2,181.025 159.258,177.967 159.258,167.513 158.369,166.624 158.369,158.877 157.099,157.607 157.099,148.209 v1(157.988,147.32) ; v1(166.25,148.335) 167.49,149.575 177.9,149.575 179.15,148.325 179.15,141.35 v1(180.45,140.05)
  Bottom Layer w0.3: v1(137.125,181.975) 137.125,183.861 JP10.7@137.16,183.896 ; U2.27@144.76,136.564 147.359,136.564 159.13,148.335 JP4.5@169.161,148.335 ; JP5.5@157.987,171.199 157.987,172.454 v1(159.258,173.725) ; v1(180.45,140.05) 184.864,135.636 JP11.7@185.928,135.636
AERMONADD7: JP4.3 JP5.3 JP10.8 JP11.8 U2.22 | length 146.4
  Top Layer w0.3: v1(137.125,189.3) 138.375,188.05 138.375,182.875 139.5,181.75 158.825,181.75 161.798,178.777 161.798,167.513 160.655,166.37 v1(160.655,150.876) ; v1(166.15,150.875) 167.45,152.175 v1(174.5,152.175)
  Bottom Layer w0.3: v1(137.125,189.3) 137.16,189.265 JP10.8@137.16,186.436 ; U2.22@141.66,138.664 141.66,142.93 149.605,150.875 JP4.3@169.161,150.875 ; JP5.3@160.527,171.199 160.527,172.454 v1(161.798,173.725) ; v1(174.5,152.175) 189.35,152.175 193.15,148.375 193.15,138.297 190.489,135.636 JP11.8@188.468,135.636
AERMONADD8: JP4.4 JP5.4 JP10.9 JP11.9 U2.19 | length 137.5
  Bottom Layer w0.3: JP10.9@139.7,183.896 138.45,185.146 138.45,187.725 142.725,192 160.525,192 164.2,188.325 164.2,182.261 163.15,181.211 163.15,173.55 161.75,172.15 161.75,169.882 JP5.4@160.527,168.659 162.433,166.753 162.433,152.146 ; U2.19@140.16,138.664 140.16,144.732 147.574,152.146 170.43,152.146 174.825,147.751 174.825,143.025 184.754,133.096 JP11.9@185.928,133.096 ; 162.433,164.975 162.525,164.975
AERMONADD9: JP4.6 JP5.6 JP10.10 JP11.10 U2.24 | length 132
  Top Layer w0.3: v1(158.623,149.606) 159.385,150.368 v1@159.385,166.497
  Bottom Layer w0.3: JP10.10@139.7,186.436 139.7,188.025 143.15,191.475 160.2,191.475 163.625,188.05 163.625,182.393 160.55,179.318 160.55,173.35 159.25,172.05 159.25,169.95 157.987,168.687 JP5.6@157.987,168.659 159.639,167.007 v1(159.639,166.116) ; U2.24@142.66,138.664 142.66,140.628 151.765,149.733 170.303,149.733 174.125,145.911 174.125,142.525 184.8,131.85 187.222,131.85 JP11.10@188.468,133.096
AERMONADD10: JP4.8 JP5.8 JP10.11 JP11.11 U2.28 | length 130.6
  Top Layer w0.3: v1@157.099,162.941 157.099,161.163 156.337,160.401 156.337,146.939 v1(157.861,145.415)
  Bottom Layer w0.3: JP10.11@142.24,183.896 141.05,185.086 141.05,188.35 143.65,190.95 159.925,190.95 163.1,187.775 163.1,182.575 157.825,177.3 157.825,173.05 156.675,171.9 156.675,169.887 JP5.8@155.447,168.659 157.099,167.007 v1(157.099,163.195) v1@157.48,163.576 ; U2.28@144.76,136.064 148.764,136.064 159.893,147.193 170.303,147.193 173.5,143.996 173.5,142.1 185.044,130.556 JP11.11@185.928,130.556
AERMONADD11: JP4.10 JP5.10 JP10.12 JP11.12 U2.30 | length 132.6
  Top Layer w0.3: v1@155.067,165.735 155.067,144.179 v1(157.814,141.431)
  Bottom Layer w0.3: JP10.12@142.24,186.436 142.24,187.965 144.65,190.375 159.725,190.375 162.575,187.525 162.575,182.85 159.125,179.4 156.375,179.4 155.375,178.4 155.375,173.125 154.175,171.925 154.175,169.927 JP5.10@152.907,168.659 155.321,166.245 v1(155.321,165.862) ; U2.30@144.76,135.064 151.447,135.064 161.036,144.653 170.303,144.653 JP4.10@171.701,143.255 171.701,142.699 185,129.4 187.312,129.4 JP11.12@188.468,130.556
AERMONADD12: JP4.12 JP5.12 JP10.13 JP11.13 U2.33 | length 135.5
  Top Layer w0.3: v1@152.781,165.735 153.416,165.1 153.416,142.24 v1(157.861,137.795)
  Bottom Layer w0.3: U2.33@144.76,133.564 153.884,133.564 162.306,141.986 170.43,141.986 184.4,128.016 JP11.13@185.928,128.016 ; JP10.13@144.78,183.896 143.4,185.276 143.4,187.875 145.325,189.8 159.55,189.8 162.05,187.3 162.05,183.1 158.85,179.9 154.175,179.9 152.875,178.6 152.875,173.15 151.55,171.825 151.55,169.842 JP5.12@150.367,168.659 152.91,166.116 v1(153.035,166.116)
AERMONADD13: JP4.14 JP5.14 JP10.14 JP11.14 U2.35 | length 139.6
  Top Layer w0.3: v1(150.368,166.243) 150.368,163.449 151.892,161.925 151.892,140.208 v1(157.988,134.112)
  Bottom Layer w0.3: U2.35@144.76,132.564 156.694,132.564 163.576,139.446 170.43,139.446 JP4.14@171.701,138.175 173.2,138.175 184.6,126.775 187.227,126.775 JP11.14@188.468,128.016 ; JP10.14@144.78,186.436 144.78,188.105 145.9,189.225 159.375,189.225 161.425,187.175 161.425,183.375 159.4,181.35 ; v1(150.368,166.243) 150.243,166.243 JP5.14@147.827,168.659 149,169.832 149,171.825 150.3,173.125 150.3,179.325 151.375,180.4 158.425,180.4 159.775,181.75
AERMONADD14: JP4.16 JP5.16 JP10.15 JP11.15 U2.37 | length 149.1
  Top Layer w0.3: v1(147.828,166.243) 147.828,163.322 150.241,160.909 150.241,138.557 156.718,132.08 159.385,132.08 v1(162.433,135.128)
  Bottom Layer w0.3: U2.37@144.76,131.564 158.996,131.564 164.465,137.033 170.303,137.033 JP4.16@171.701,135.635 174.84,135.635 184.999,125.476 JP11.15@185.928,125.476 ; JP10.15@147.32,183.896 146.075,185.141 146.075,187.625 147.175,188.725 159.125,188.725 160.85,187 160.85,183.7 158.05,180.9 146.775,180.9 145.35,179.475 145.35,173.6 146.5,172.45 146.5,169.872 JP5.16@145.287,168.659 147.703,166.243 v1(147.828,166.243)
AERMONADD15: JP4.18 JP5.18 JP10.16 JP11.16 U2.40 | length 149
  Top Layer w0.3: v1@145.161,166.497 145.161,164.973 149.733,160.401 149.733,137.922 156.21,131.445 v1(163.195,131.445)
  Bottom Layer w0.3: U2.40@144.76,130.064 161.56,130.064 165.989,134.493 170.303,134.493 JP4.18@171.701,133.095 173.43,133.095 182.25,124.275 187.267,124.275 JP11.16@188.468,125.476 ; v1(145.415,166.243) 145.163,166.243 JP5.18@142.747,168.659 143.925,169.837 143.925,172.2 142.675,173.45 142.725,178.625 142.725,179.925 144.2,181.4 157.575,181.4 160.275,184.1 160.275,186.75 158.825,188.2 149.084,188.2 JP10.16@147.32,186.436
AERMONREQ: JP4.21 JP11.19 R24.2 U2.42 | length 46.2
  Bottom Layer w0.3: U2.42@144.76,129.064 151.225,129.064 153.963,126.326 165.44,126.326 167.129,128.015 JP4.21@169.161,128.015 170.351,126.825 174.925,126.825 181.354,120.396 JP11.19@185.928,120.396
AERPASSACK: JP5.29 JP10.20 R25.2 U2.17 | length 73.9
  Bottom Layer w0.3: R25.2@134.454,164.592 134.454,165.647 132.969,167.132 129.921,167.132 128.651,168.402 128.651,170.055 JP5.29@127.507,171.199 127.507,172.357 133.075,177.925 136.725,177.925 141.2,182.4 150.675,182.4 151.125,182.85 151.125,185.161 JP10.20@152.4,186.436 ; R25.2@134.493,164.592 137.033,164.592 139.16,162.465 U2.17@139.16,138.664
AERPASSREQ: JP5.21 JP10.19 U2.18 | length 57.8
  Bottom Layer w0.3: JP5.21@137.667,170.943 138.938,169.672 138.938,167.259 139.66,166.537 U2.18@139.66,138.664 ; JP5.21@137.667,171.199 137.667,178.16 141.407,181.9 151.225,181.9 152.4,183.075 JP10.19@152.4,183.896 JP10.19@152.221,183.896
AERSEQACK: JP6.29 JP12.20 R22.1 U2.67 | length 47.8
  Bottom Layer w0.3: JP12.20@124.46,81.788 122.625,83.623 122.625,95.197 JP6.29@123.951,96.523 124.297,96.523 135.16,107.386 U2.67@135.16,123.464